# EAGLE board OECOC_controlbordroutes (EAGLE 9.6.2)
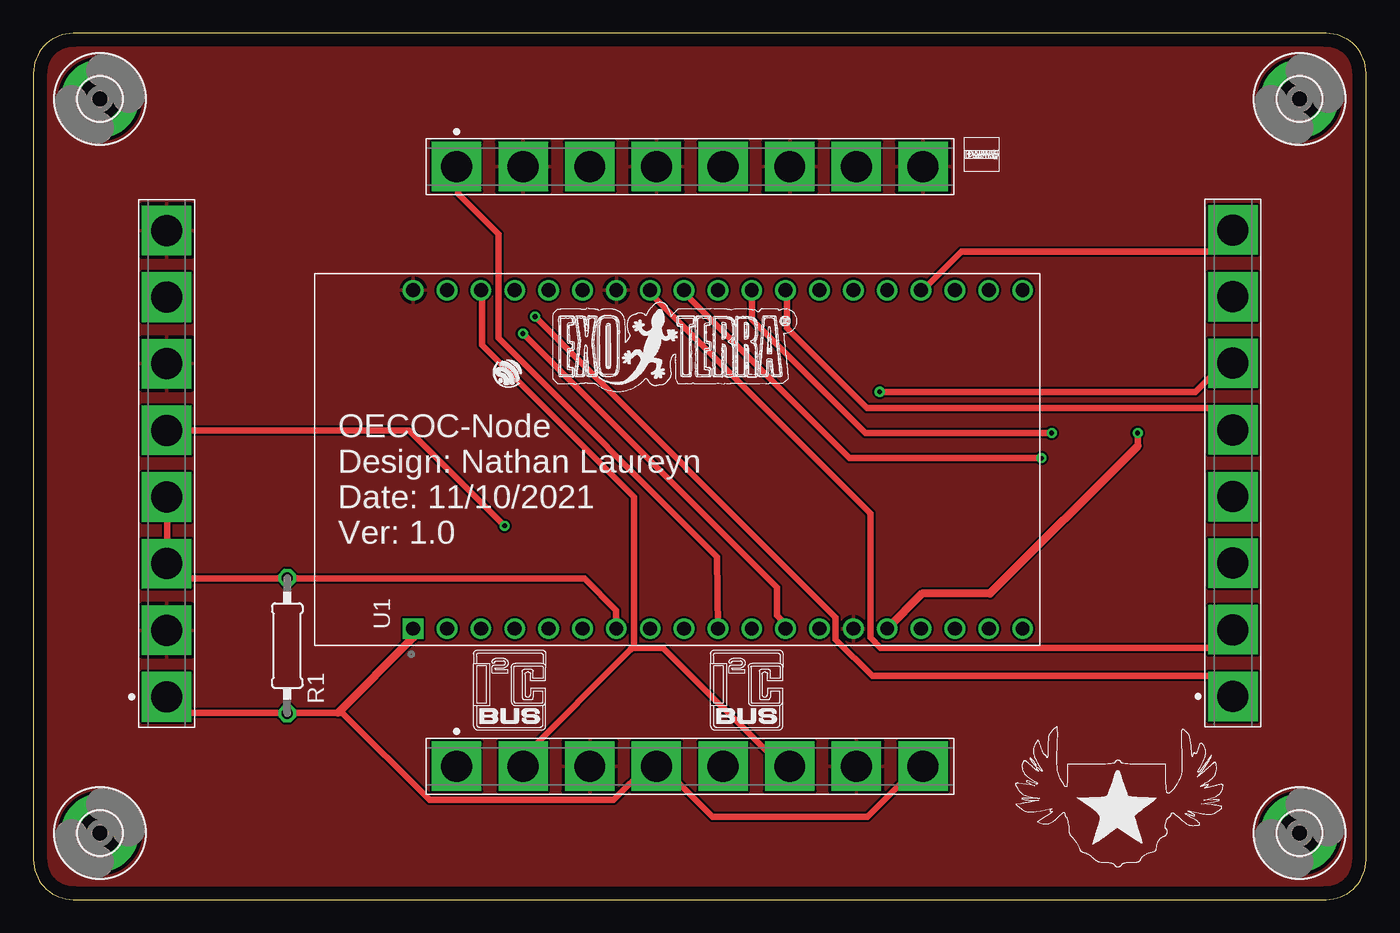
[diagram p0: board, top side]
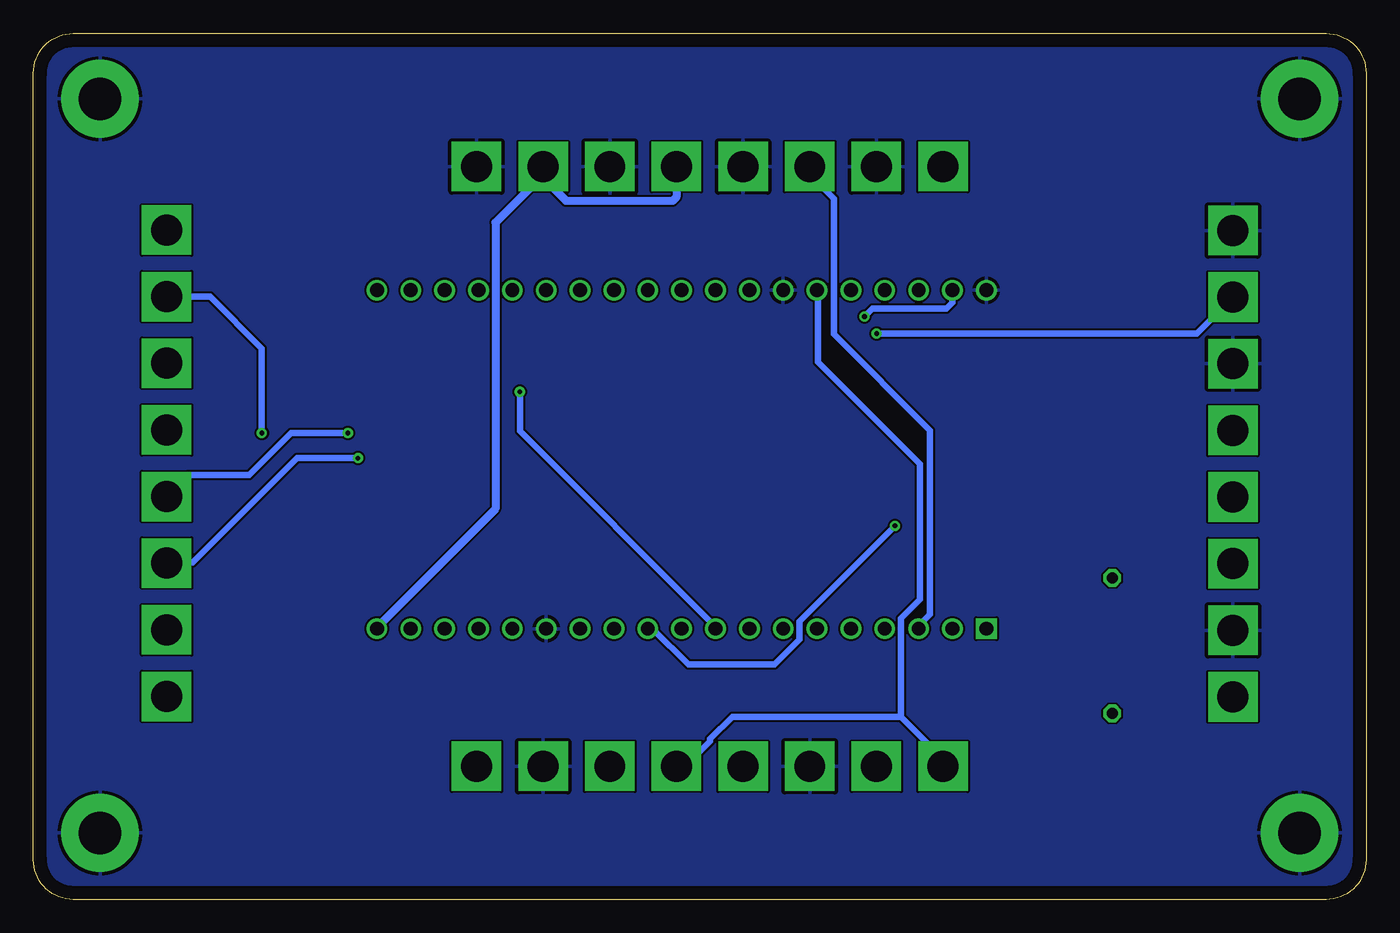
[diagram p1: board, bottom side, seen from below]

Size 100 x 65 mm. Coordinates in mm from the lower left corner, seen from the top.
Outline: 0,62 0,3 arc90 3,0 97,0 arc90 100,3 100,62 arc90 97,65 3,65 arc90 0,62
Copper layers (1*16): Top 0.035mm / dielectric 1.5mm / Bottom 0.035mm
Design rules "default": minimum track width 6mil, minimum drill 0.35mm, track to track 6mil, track to pad 6mil, pad to pad 6mil, via to via 6mil, smd to smd 6mil, copper to edge 40mil, drill to drill 6mil, minimum pad ring 10mil, minimum via ring 8mil, stop-mask expansion 4mil, vias tented up to drill 0mil, thermal gap 10mil

## Footprints (pad centres in the part's own frame; a part is rotated, then mirrored left to right if it is on the bottom)
3,2-PAD = drill 3.2 pad 5.842: B3,2 0,0
0207/10 = drill 0.813 octagon: 1 -5.08,0; 2 5.08,0
MODULE_ESP32-DEVKITC-32D = drill 1.04 square: 1 -12.7,19.76 | drill 1.04: 2 -12.7,17.22; 3 -12.7,14.68; 4 -12.7,12.14; 5 -12.7,9.6; 6 -12.7,7.06; 7 -12.7,4.52; 8 -12.7,1.98; 9 -12.7,-0.56; 10 -12.7,-3.1; 11 -12.7,-5.64; 12 -12.7,-8.18; 13 -12.7,-10.72; 14 -12.7,-13.26; 15 -12.7,-15.8; 16 -12.7,-18.34; 17 -12.7,-20.88; 18 -12.7,-23.42; 19 -12.7,-25.96; 20 12.7,19.76; 21 12.7,17.22; 22 12.7,14.68; 23 12.7,12.14; 24 12.7,9.6; 25 12.7,7.06; 26 12.7,4.52; 27 12.7,1.98; 28 12.7,-0.56; 29 12.7,-3.1; 30 12.7,-5.64; 31 12.7,-8.18; 32 12.7,-10.72; 33 12.7,-13.26; 34 12.7,-15.8; 35 12.7,-18.34; 36 12.7,-20.88; 37 12.7,-23.42; 38 12.7,-25.96
HDRV8W150P500_1X8_2488X140X1204B = drill 2.321 pad 3.714 square: 1 0,0; 2 5,0; 3 10,0; 4 15,0; 5 20,0; 6 25,0; 7 30,0; 8 35,0

## Placement (x,y rotation side)
H1  MOUNT-PAD-ROUND3.2  [3,2-PAD]  95,5 0 top
H2  MOUNT-PAD-ROUND3.2  [3,2-PAD]  5,5 0 top
H3  MOUNT-PAD-ROUND3.2  [3,2-PAD]  5,60.08 0 top
H4  MOUNT-PAD-ROUND3.2  [3,2-PAD]  95,60.08 0 top
R1  4k7  [0207/10]  19.05,19.05 270 top
U1  ESP32-DEVKITC-32D  [MODULE_ESP32-DEVKITC-32D]  48.26,33.02 90 top
U$1  [LOGO]  81.28,6.35 0 top
U$2  [I2C]  33.02,12.7 0 top
U$3  PHOENIXCONTACT_PINSTRIP  [HDRV8W150P500_1X8_2488X140X1204B]  31.75,10 0 top
U$4  [I2C]  50.8,12.7 0 top
U$5  [LOGO_EXO-TERRA]  38.1,38.1 0 top
U$6  PHOENIXCONTACT_PINSTRIP  [HDRV8W150P500_1X8_2488X140X1204B]  10,15.21 90 top
U$7  PHOENIXCONTACT_PINSTRIP  [HDRV8W150P500_1X8_2488X140X1204B]  90,15.24 90 top
U$8  PHOENIXCONTACT_PINSTRIP  [HDRV8W150P500_1X8_2488X140X1204B]  31.75,55 0 top
U$9  [LOGO_ESPRESSIF-SYSTEMS]  34.29,38.1 0 top
U$10  [LOGO_PHOENIX-CONTACT]  69.85,54.61 0 top

## Library data of the parts
H1-H4 = holes
R1 = rcl; SPICEPREFIX: R
U1 = Personal; AVAILABILITY: In Stock; DESCRIPTION: WiFi Development Tools (802.11) ESP32 General Development Kit, ESP32-WROOM-32D on the board; MF: Espressif Systems; MP: ESP32-DEVKITC-32D; PACKAGE: None; PRICE: None; PURCHASE-URL: https://pricing.snapeda.com/search/part/ESP32-DEVKITC-32D/?ref=eda
U$1 U$3 U$5-U$10 = Personal
U$2 U$4 = micro-philips

## Nets
+3V3: R1.2 U1.1 U$3.4 U$3.8 U$6.1
+5V: U1.19 U$8.5 U$8.7
BUZZER: U1.10 U$8.1
DS18B20: R1.1 U1.7 U$6.3 U$6.4
GND: H1.B3,2 H2.B3,2 H3.B3,2 H4.B3,2 U1.14 U1.20 U1.26 U$3.3 U$3.7 U$6.2 U$6.6 U$6.8 U$8.2 U$8.4 U$8.6 U$8.8
IN1: U1.21 U$7.1
IN2: U1.27 U$7.2
IN3: U1.28 U$7.3
IN4: U1.30 U$7.4
IN5: U1.31 U$7.5
IN6: U1.9 U$7.6
IN7: U1.15 U$7.7
IN8: U1.35 U$7.8
N$1: U1.3 U$8.3
REED_1: U1.12 U$6.7
REED_2: U1.11 U$6.5
SCL: U1.22 U$3.2 U$3.6
SDA: U1.25 U$3.1 U$3.5

## Tracks (layer width: path | path; a pad name or v marks a point on that pad's centre or on a via)
+3V3
  Top 0.152: 46.79,9.91 U$3.4 | 19.05,14.02 R1.2
  Top 0.5: U$6.1 10.06,15.09 11.12,14.02 19.05,14.02 22.86,14.02 23.16,14.02 29.72,7.47 43.54,7.47 46.07,10 U$3.4 | 46.79,9.91 47.24,9.91 50.95,6.2 62.59,6.2 66.29,9.91 66.44,10 U$3.8
  Top 0.6: 22.86,14.02 28.5,19.66 U1.1
+5V
  Bottom 0.152: 74.22,20.42 U1.19 | 61.87,54.86 U$8.7
  Bottom 0.6: 74.22,20.42 65.32,29.32 65.32,50.81 61.87,54.25 | 61.87,54.86 61.87,54.25 | U$8.5 51.75,52.7 52.02,52.43 60.05,52.43 61.87,54.25
BUZZER
  Top 0.5: U1.10 51.3,25.72 34.9,42.11 34.9,49.94 31.85,52.98 31.85,54.86 U$8.1
DS18B20
  Top 0.152: 10.06,25.15 U$6.3 10.06,25.3 | 19.05,24.08 R1.1 | 10.06,30.18 U$6.4
  Top 0.5: 10.06,25.15 11.12,24.08 19.05,24.08 41.35,24.08 43.72,21.71 U1.7 | 10.06,25.3 10.06,30.18
GND
  pour Top: -2.54,67.31 102.87,67.31 102.87,-2.54 -2.54,-2.54
  pour Bottom: -2.54,67.31 102.87,67.31 102.87,-2.54 -2.54,-2.54
IN1  (via drill 0.35)
  Top 0.5: v37.64,43.74 60.2,21.18 60.2,19.51 62.94,16.76 88.39,16.76 89.92,15.24 U$7.1
  Bottom 0.5: U1.21 31.04,44.8 31.5,44.35 37.03,44.35 v37.64,43.74
IN2
  Top 0.5: U1.27 46.33,45.72 46.33,45.41 62.79,28.96 62.79,19.66 63.55,18.9 88.7,18.9 89.92,20.12 U$7.2
IN3  (via drill 0.35)
  Top 0.5: v75.64,33.12 61.21,33.12 48.92,45.41 48.92,45.72 U1.28
  Bottom 0.152: 89.92,25.3 U$7.3
  Bottom 0.5: v75.64,33.12 80.21,33.12 88.04,25.3 89.92,25.3
IN4  (via drill 0.35)
  Top 0.5: U1.30 53.9,43.53 62.43,35 v76.4,35
  Bottom 0.152: 89.92,30.33 U$7.4
  Bottom 0.5: v76.4,35 80.67,35 83.82,31.85 88.39,31.85 89.92,30.33
IN5
  Top 0.152: 89.92,35.36 U$7.5
  Top 0.5: 89.92,35.36 88.39,36.88 62.53,36.88 56.54,42.88 56.54,45.72 U1.31
IN6  (via drill 0.35)
  Top 0.152: 89.92,40.23 U$7.6
  Top 0.5: v63.5,38.1 87.17,38.1 89.31,40.23 89.92,40.23
  Bottom 0.152: 48.92,20.42 U1.9
  Bottom 0.5: 48.92,20.42 49.23,20.73 49.23,20.88 63.5,35.15 v63.5,38.1
IN7  (via drill 0.35)
  Top 0.5: v82.86,35 82.86,34.04
  Top 0.6: 82.86,34.04 71.78,22.96 66.67,22.96 U1.15
  Bottom 0.5: U$7.7 86.74,45.24 82.86,41.35 v82.86,35
IN8
  Top 0.152: 89.92,50.14 U$7.8
  Top 0.5: 89.92,50.14 88.39,48.62 69.65,48.62 66.75,45.72 U1.35
N$1
  Bottom 0.152: 33.68,20.42 U1.3
  Bottom 0.5: 33.68,20.42 32.72,21.39 32.72,35.2 39.93,42.42 39.93,52.58 41.6,54.25 41.6,54.86 U$8.3
REED_1  (via drill 0.35)
  Top 0.5: v36.73,42.47 55.78,23.42 55.78,21.34 56.39,20.73 56.39,20.42 U1.12
  Bottom 0.5: v36.73,42.47 12.7,42.47 10.06,45.11 U$6.7
REED_2  (via drill 0.35)
  Top 0.5: U$6.5 28.19,35.21 v35.36,28.04
  Bottom 0.152: 53.8,20.27 U1.11
  Bottom 0.5: 53.8,20.27 53.49,20.27 50.85,17.63 44.4,17.63 42.52,19.51 42.52,20.88 v35.36,28.04
SCL
  Top 0.152: 44.78,18.72 44.96,18.9
  Top 0.5: U1.22 33.68,45.72 33.68,41.6 45.07,30.21 45.07,19.01 44.78,18.72 36.88,10.82 36.88,10.06 U$3.2 | 44.96,18.9 47.24,18.9 56.08,10.06 56.69,10.06 U$3.6
SDA
  Bottom 0.152: 41.15,45.72 U1.25 | 49.23,12.04 49.23,11.89
  Bottom 0.5: 41.15,45.72 41.15,40.34 33.48,32.66 33.48,22.5 34.9,21.08 34.9,13.72 | 34.9,13.72 31.85,10.67 31.85,10.06 U$3.1 | 49.23,11.89 51.05,10.06 51.66,10.06 U$3.5 | 49.23,12.04 47.55,13.72 34.9,13.72

## Text on the board
tNames: OECOC-Node / Design: Nathan Laureyn / Date: 11/10/2021 / Ver: 1.0
tValues: BUZZER | GND | A SENS | GND | 5V | GND | 5V | GND | GND | IN8 | REED_1 | IN7 | GND | IN6 | REED_2 | IN5 | IN4 | TEMP | IN3 | TEMP | IN2 | GND | IN1 | 3V3 | SDA | SCL | GND | 3V3 | SDA | SCL | GND | 3V3